# Altium PCB PCB_LVTN.PcbDoc
Units mil, origin at the board's own origin, x right, y up, seen from the top; angles counter-clockwise.
Board outline 2086.61 x 2086.61 mil, 2 copper layers (Top Layer, Bottom Layer); 16 components, 14 nets, 74 pads, 2 vias.
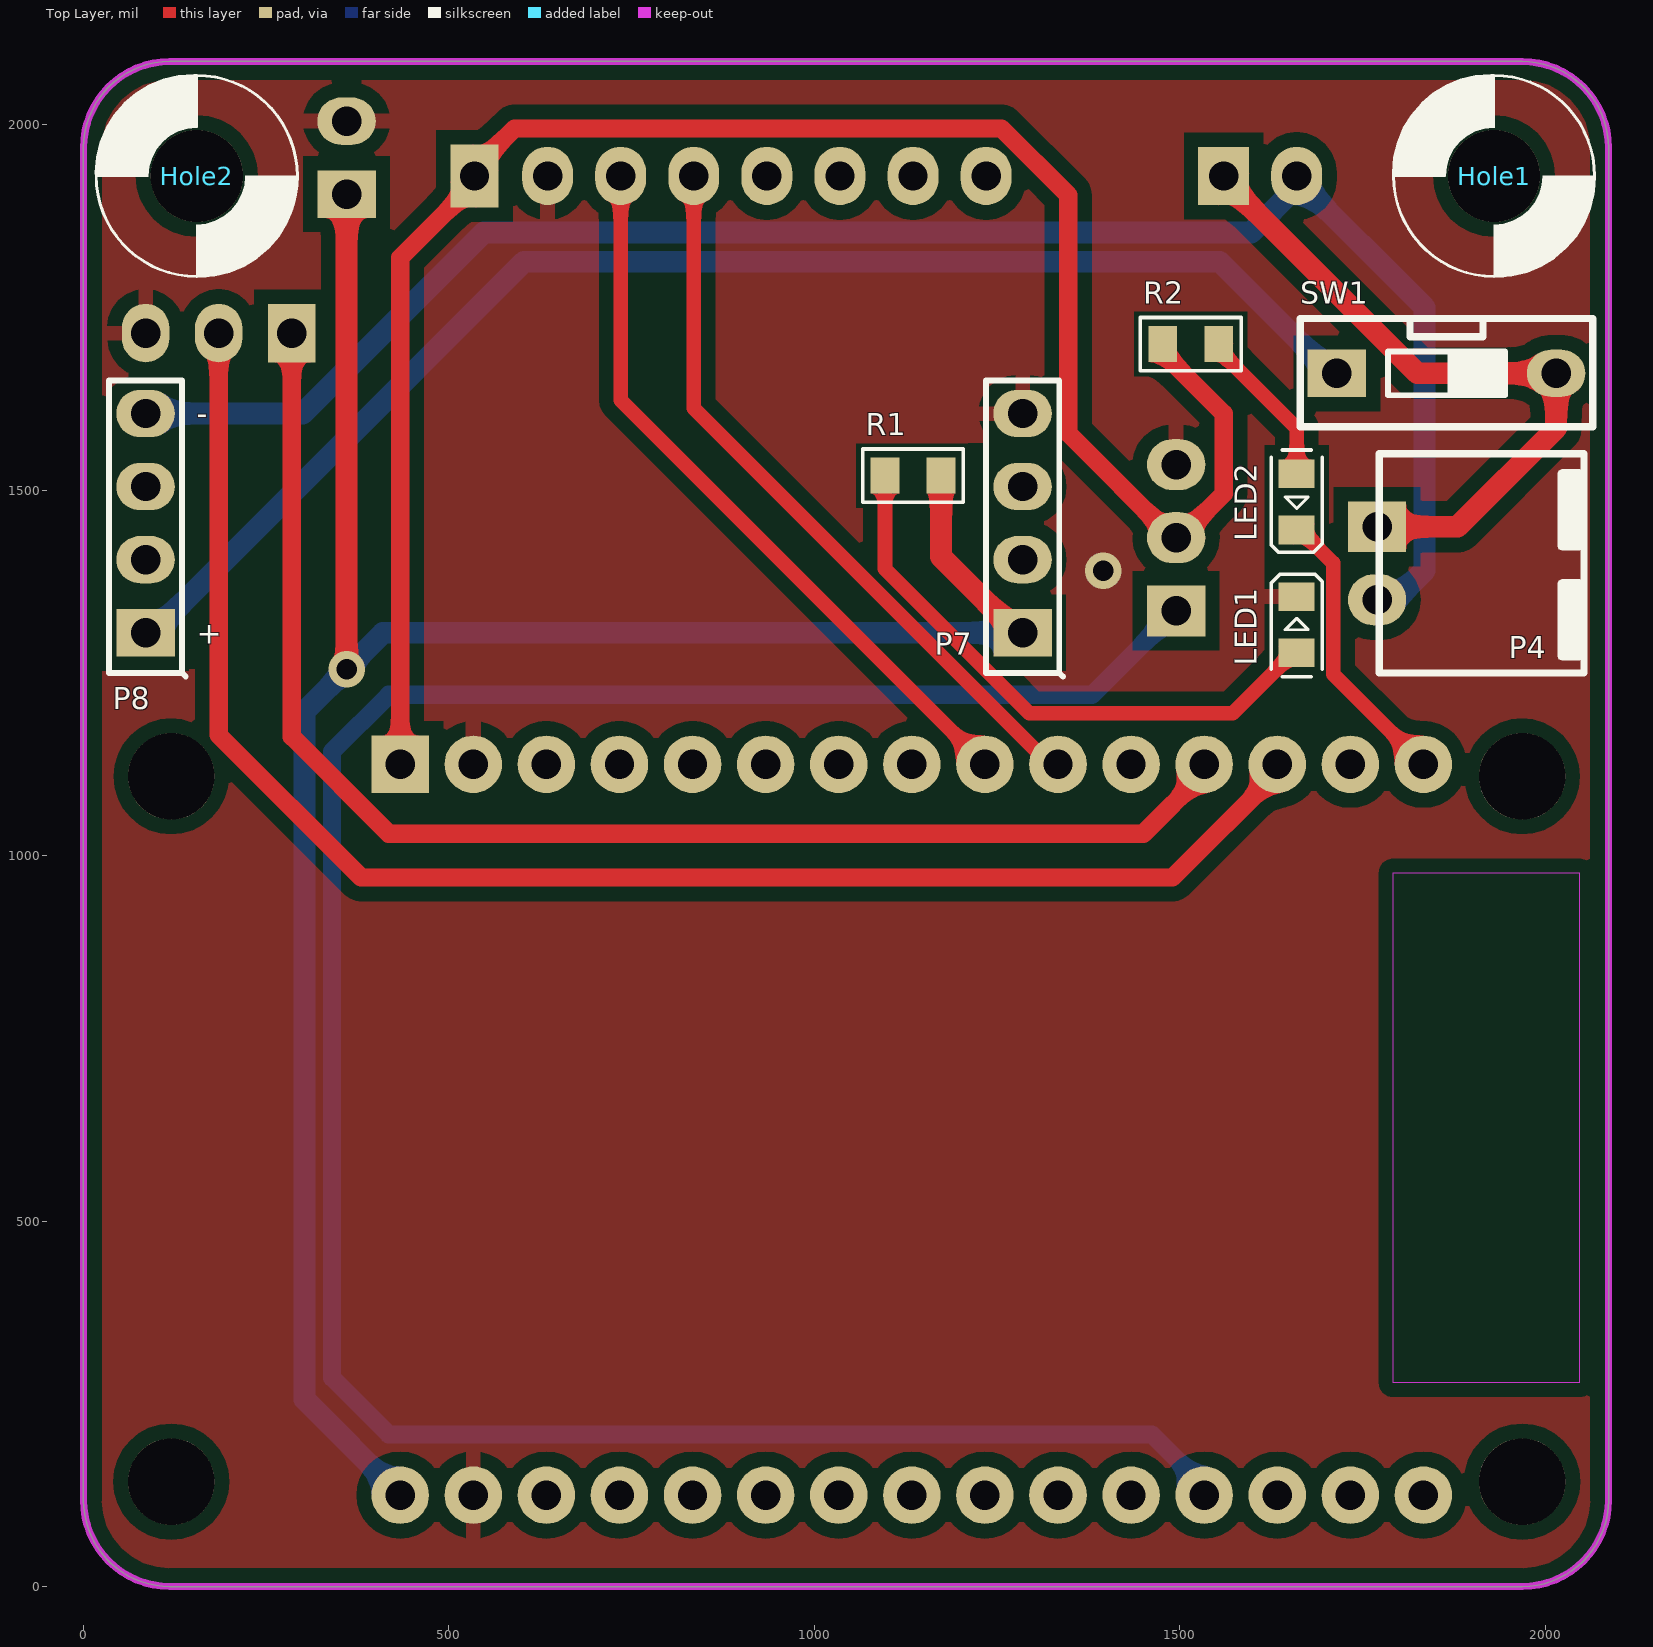
[diagram p0: Top Layer view]
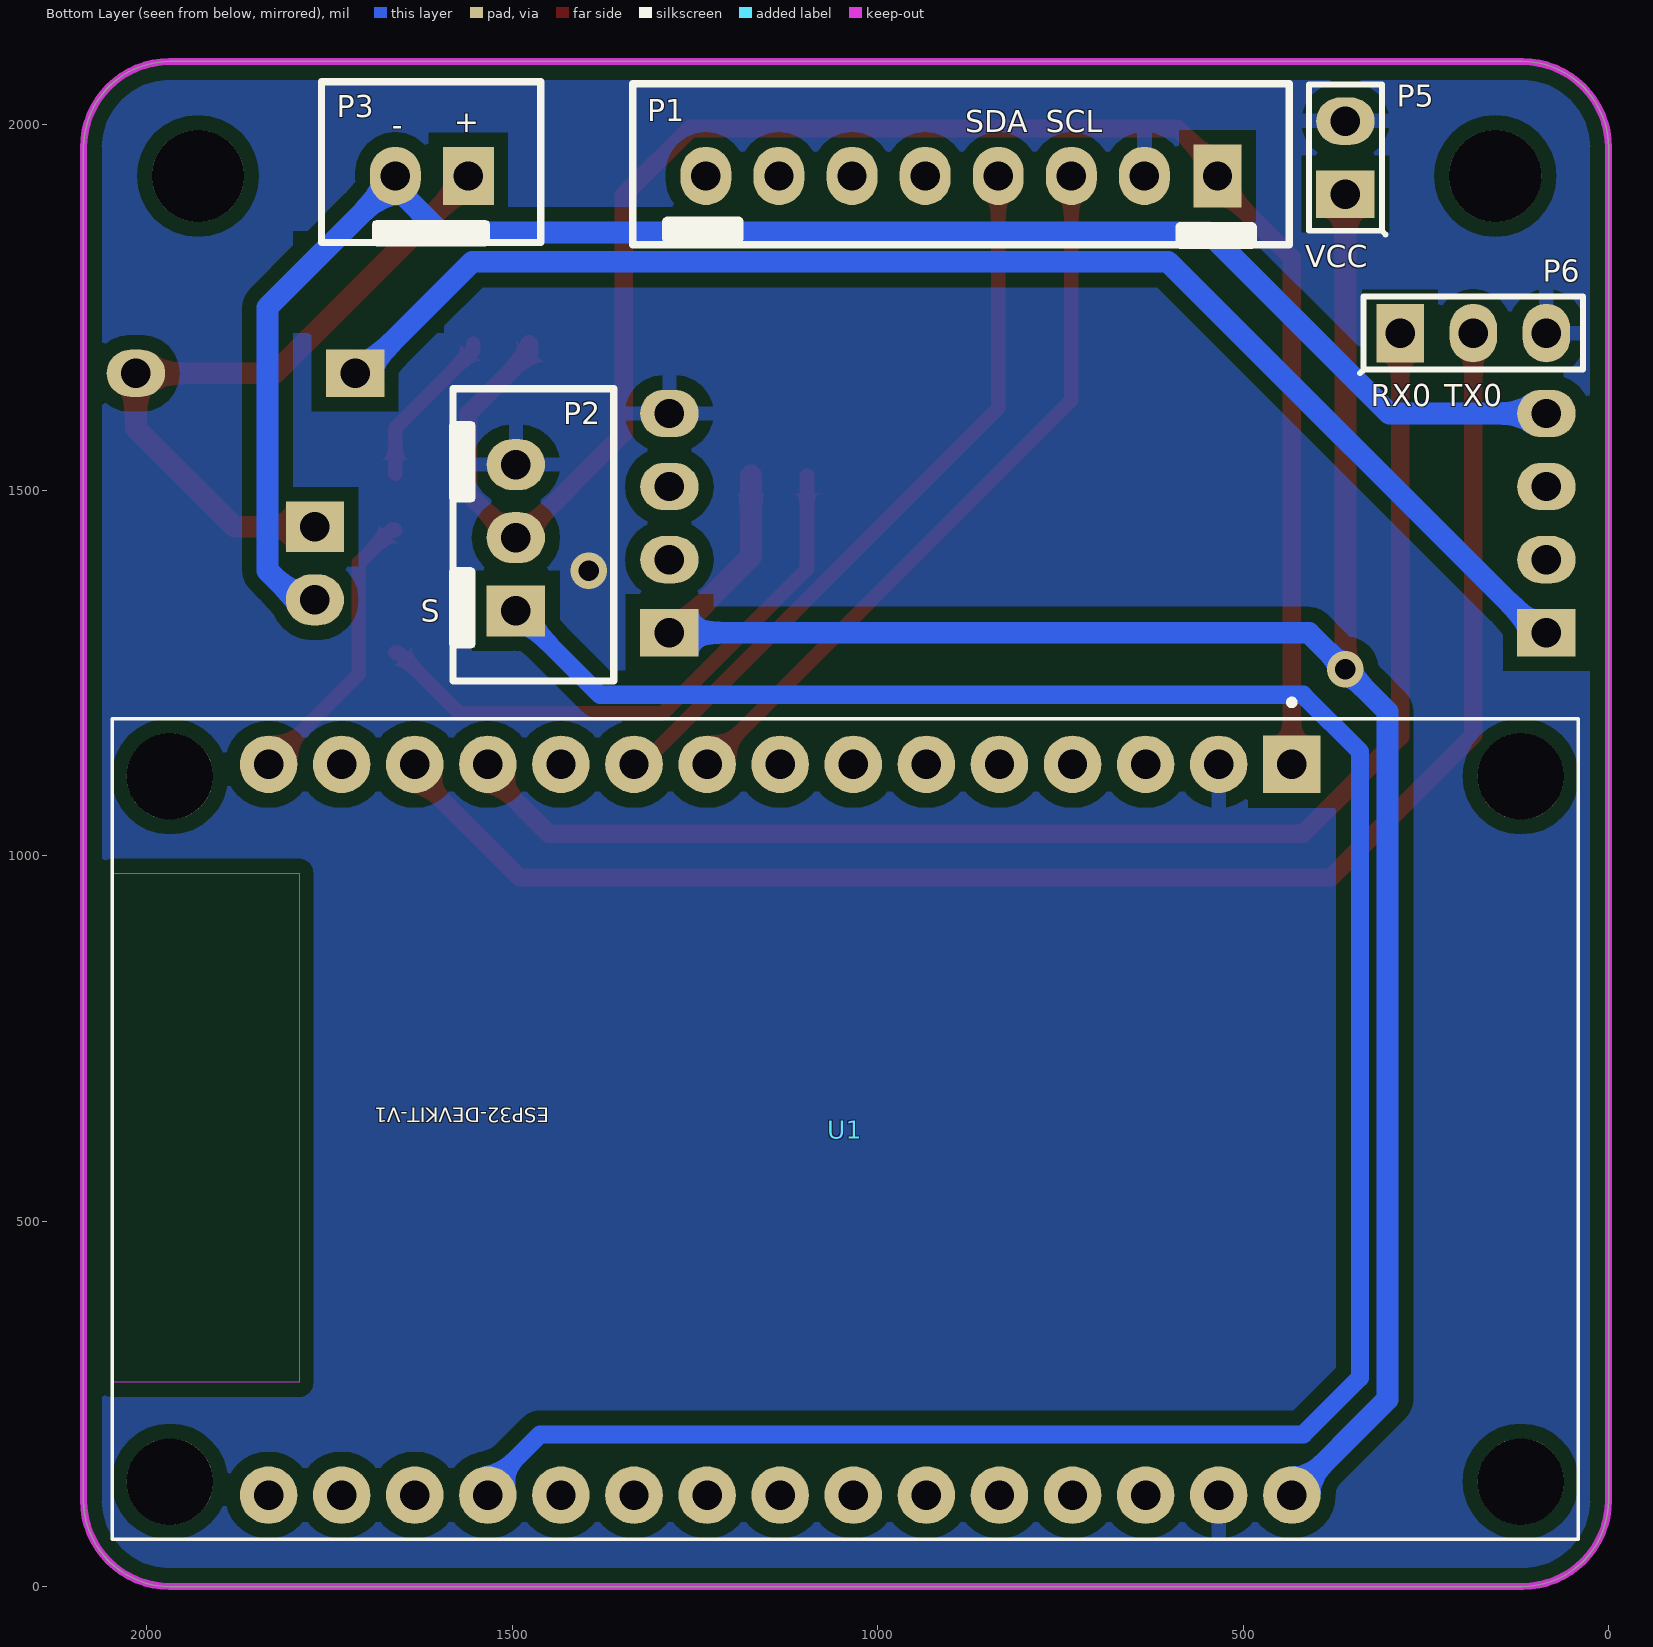
[diagram p1: Bottom Layer view, seen from below]
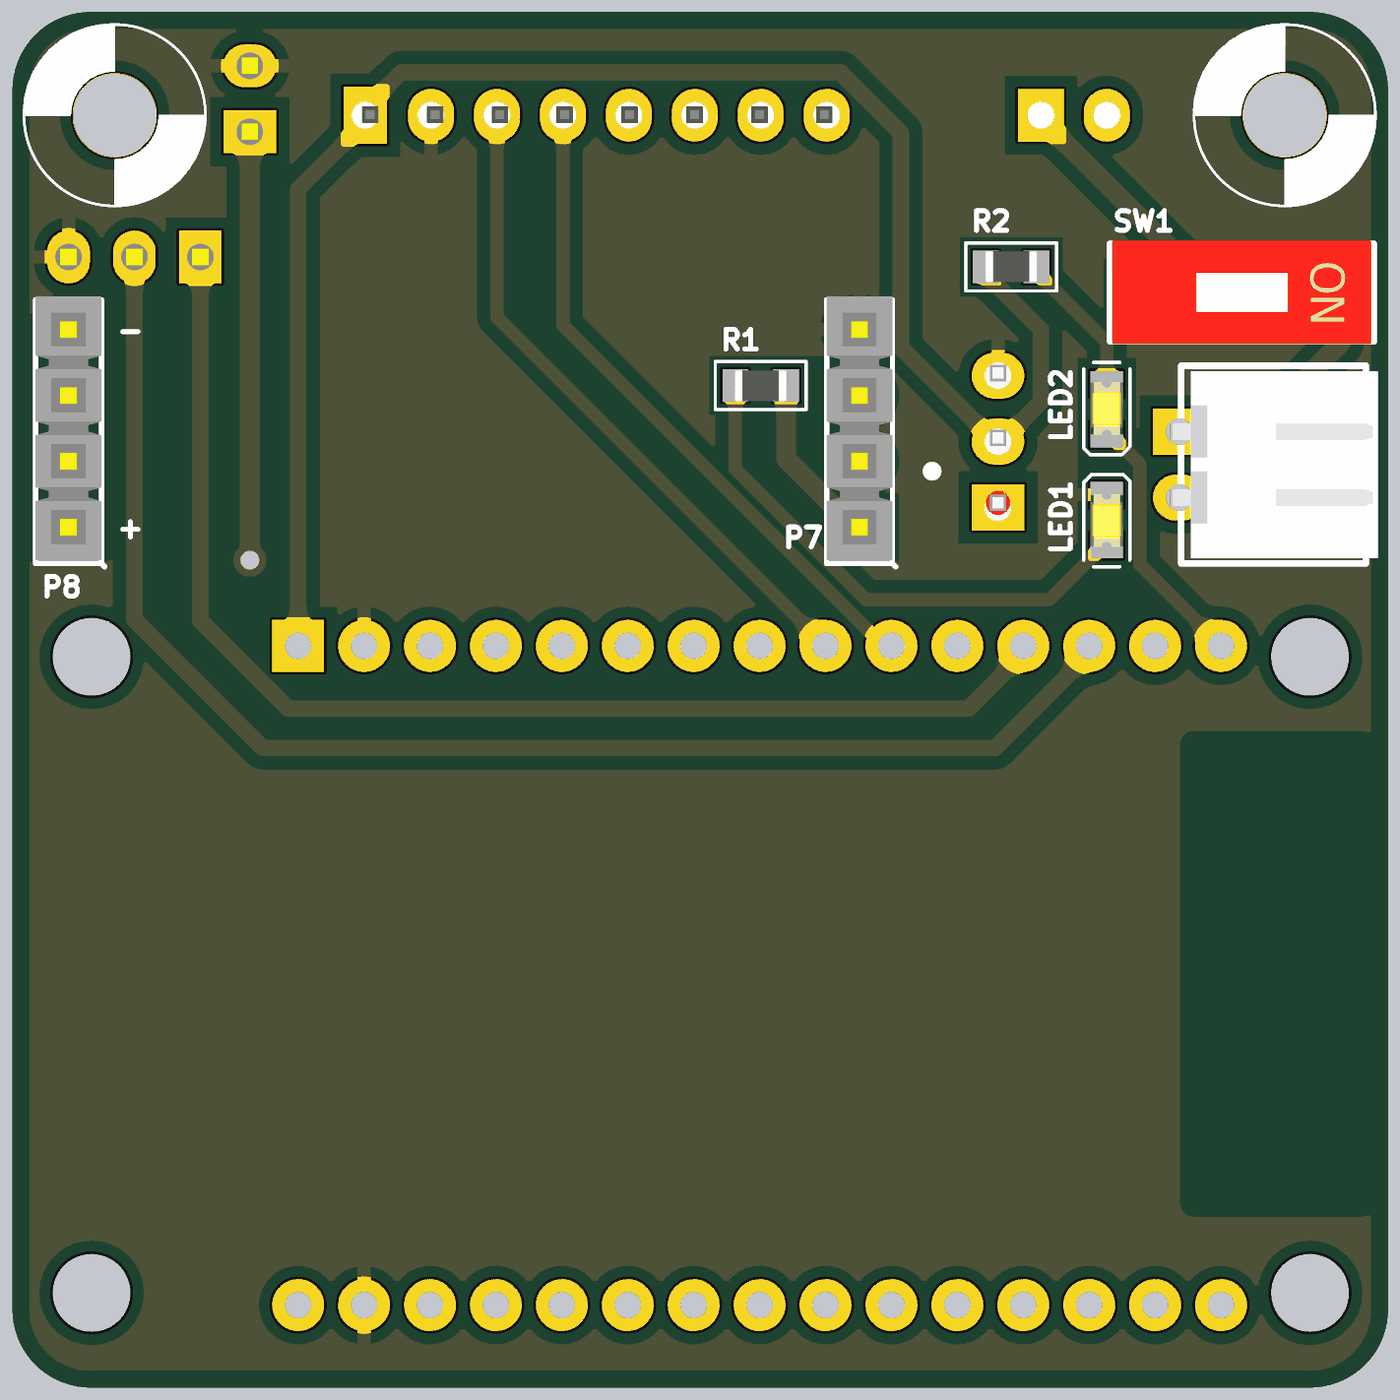
[diagram p2: 3D render of the assembled board from above, using the file's embedded part models]
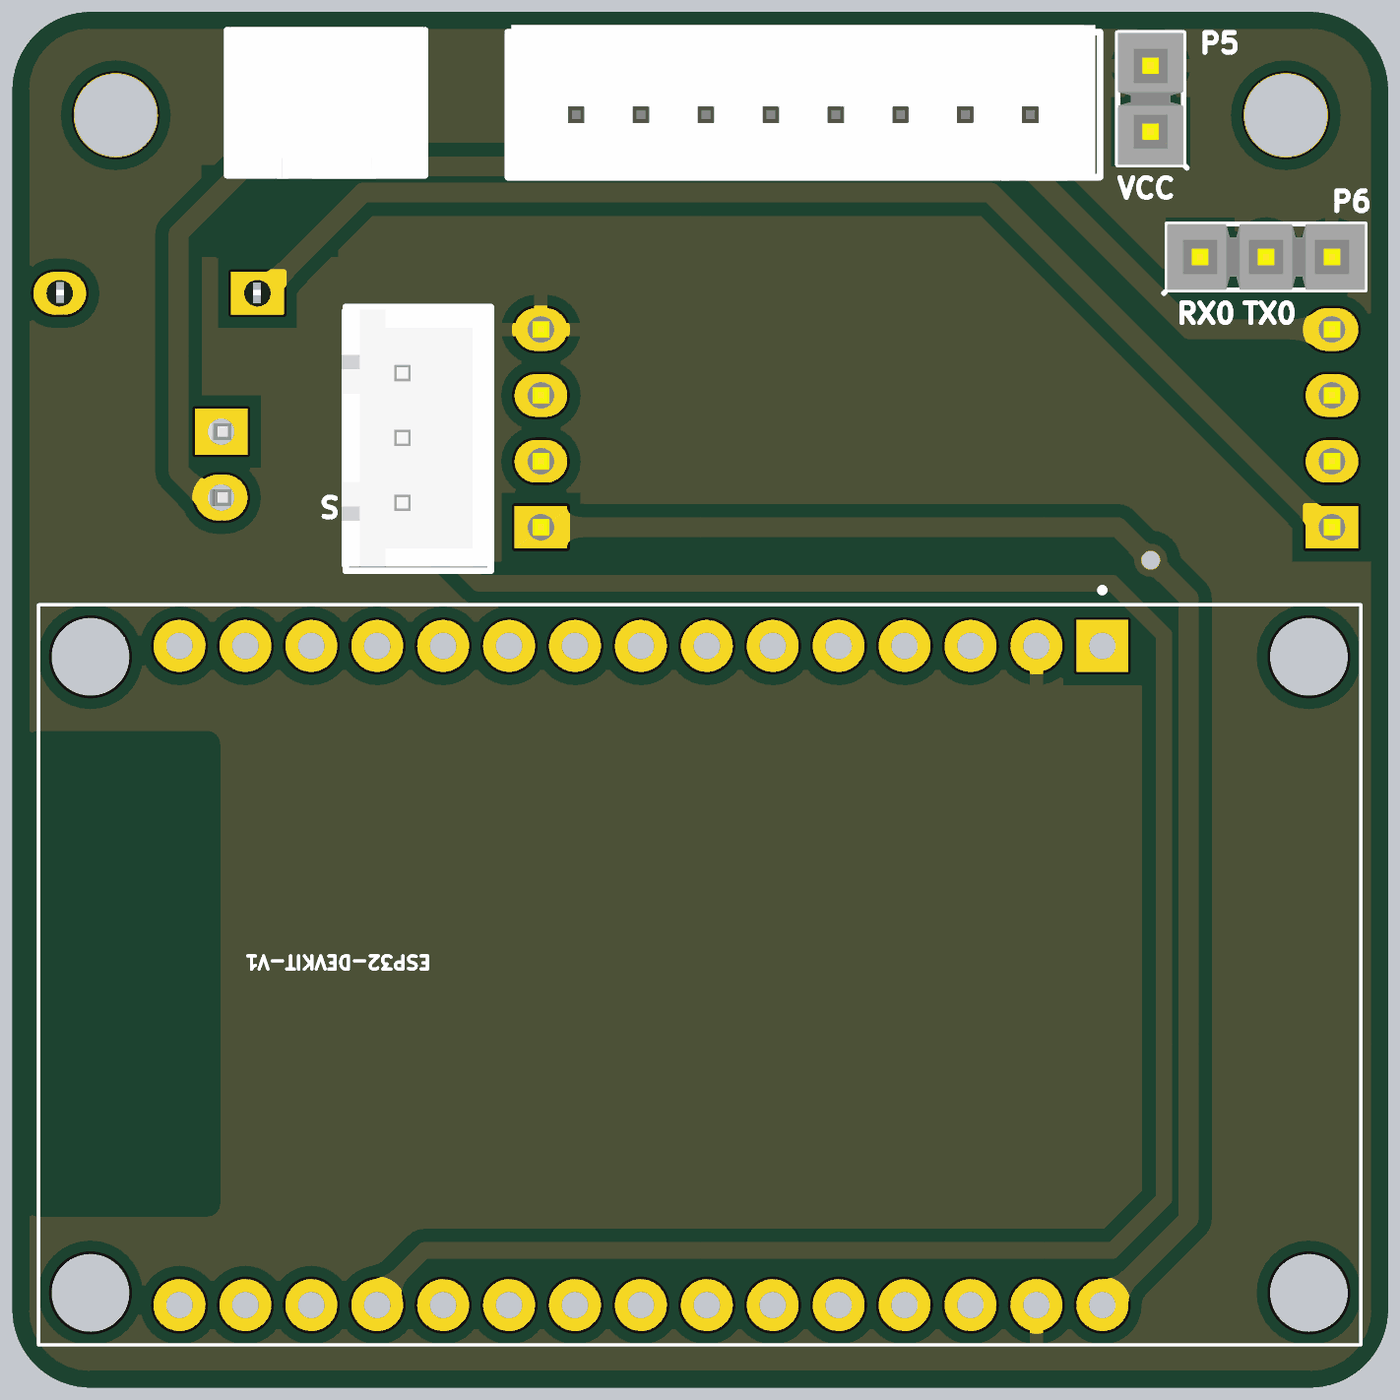
[diagram p3: 3D render of the assembled board from below, using the file's embedded part models]

## Layer stack, top to bottom
Top Solder: solder mask 0.4, Solder Resist, Dk 3.5
Top Layer: signal copper 1.4
Dielectric 1: dielectric 12.6, FR-4, Dk 4.8
Bottom Layer: signal copper 1.4
Bottom Solder: solder mask 0.4, Solder Resist, Dk 3.5

## Board outline
0,118.11 0,1968.5 cw(c118.11,1968.5) 118.11,2086.61 1968.5,2086.61 cw(c1968.5,1968.5) 2086.61,1968.5 2086.61,118.11 cw(c1968.5,118.11) 1968.5,0 118.11,0 cw(c118.11,118.11)

## Design rules (kind name [scope] priority, off if disabled: settings)
Clearance [All] p1: gap=20 ignorepadtopadclearanceinfootprint=FALSE except(10: Arc-Arc Arc-Track Arc-SMDPad Arc-THPad Arc-Via Arc-Text Arc-Hole Track-Track Track-SMDPad Track-THPad Track-Via Track-Text Track-Hole SMDPad-SMDPad SMDPad-THPad SMDPad-Via SMDPad-Text SMDPad-Hole THPad-THPad THPad-Via THPad-Text THPad-Hole Via-Via Via-Text Via-Hole Text-Text Text-Hole)
PolygonConnect [All] p1: thpad.connectstyle=Relief thpad.reliefconductorwidth=20 thpad.reliefentries=4 thpad.polygonreliefangle="90 Angle" thpad.airgapwidth=20 smdpad.connectstyle=Relief smdpad.reliefconductorwidth=20 smdpad.reliefentries=4 smdpad.polygonreliefangle="90 Angle" smdpad.airgapwidth=20 via.connectstyle=Direct via.reliefconductorwidth=20 via.reliefentries=4 via.polygonreliefangle="90 Angle" via.airgapwidth=20
RoutingVias [All] p1: holewidth=28 width=50 viastyle="Through Hole" minholewidth=28 minwidth=50 maxholewidth=28 maxwidth=50
SolderMaskExpansion [All] p1: expansion=4
Width [All] p1: maxlimit=30 minlimit=10 preferedwidth=20
30 further rules are at their usual default settings.

## Components (designator, comment, footprint, x,y, rotation, side; value= is the part's Value field where it differs from the comment)
Hole1 "3mm" SCREW/3M/7M 1930,1930 r0 top
Hole2 "3mm" SCREW/3M/7M 155,1930 r0 top
LED1 "Led" "Led SMD 0805" 1660,1315 r90 top
LED2 "Led" "Led SMD 0805" 1660,1485 r270 top
P1 "MPU6050" "CON Header 8" 535,1930 r0 bottom value="Connector 8"
P2 "PULSE-SENSOR" "CON Header 3" 1495,1335 r90 bottom value="Connector 3"
P3 "Power" "CON Header 2" 1760,1930 r0 bottom value="Connector 2"
P4 "Charge" "CON Header 2 - RA" 1770,1250 r270 top value="Connector 2"
P5 "Header 2" "Header 2" 360,1905 r90 bottom
P6 "Header 3" "Header 3" 285,1715 r180 bottom
P7 "MT3608_OUT" "Header 4" 1285,1305 r90 top
P8 "MT3608_IN" "Header 4" 85,1305 r90 top
R1 "10k" "R 0805 (2012)" 1135,1520 r0 top
R2 "4K7" "R 0805 (2012)" 1515,1700 r180 top
SW1 "SW Power" SW/DIP1 1715,1660 r270 top
U1 "ESP32-DEVKIT-V1" MODULE_ESP32_DEVKIT_V1 1044.17,625 r270 bottom

## Footprints (in the part's own frame and the unit in brackets; to place one, negate y for a bottom-side part, rotate by r counter-clockwise, add the part's x,y. Pads: shape width x height; smd on the part's side, far side on the other; paste and mask are expansions set on the pad)
"CON Header 2" [mm]
  rect 1.771x2.025 hole 1.02: 1(-5.08,0)
  oval 1.771x2.025 hole 1.02: 2(-2.54,0)
  silkscreen extent -7.59,-3.28 0.03,2.45, body extent -7.55,-3.4 -0.05,2.4, height 7.25
"CON Header 2 - RA" [mm]
  rect 1.771x2.025 hole 1.02: 1(-5.08,0)
  oval 1.771x2.025 hole 1.02: 2(-2.54,0)
  silkscreen extent -7.62,0.08 0,7.19, body extent -7.42,-0.38 -0.2,7.66, height 5.84
"CON Header 3" [mm]
  rect 1.771x2.025 hole 1.02: 1(0,0)
  oval 1.771x2.025 hole 1.02: 2(2.54,0) 3(5.08,0)
  silkscreen extent -2.44,-3.4 7.72,2.32, body extent -2.27,-3.4 7.63,2.35, height 7.25
"CON Header 8" [mm]
  rect 1.677x2.203 hole 1.02: 1(0,0)
  oval 1.771x2.025 hole 1.02: 2(2.54,0) 3(5.08,0) 4(7.62,0) 5(10.16,0) 6(12.7,0) 7(15.24,0) 8(17.78,0)
  silkscreen extent -2.49,-3.2 20.32,2.53, body extent -2.31,-3.48 20.19,2.32, height 7
"Header 2" [mil]
  rect 64.72x80 hole 40.16: 1(0,0)
  oval 64.72x80 hole 40.16: 2(100,0)
  silkscreen extent -55,-55 150,50, body extent -50,-50 150,50, height 350
"Header 3" [mil]
  rect 64.72x80 hole 40.16: 1(0,0)
  oval 64.72x80 hole 40.16: 2(100,0) 3(200,0)
  silkscreen extent -55,-55 250,50, body extent -50,-50 250,50, height 350
"Header 4" [mil]
  rect 64.72x80 hole 40.16: 1(0,0)
  oval 64.72x80 hole 40.16: 2(100,0) 3(200,0) 4(300,0)
  silkscreen extent -60,-55 345,50, body extent -50,-50 350,50, height 350
"Led SMD 0805" [mm] "Led SMD 0805"
  rect 1x1.25 smd: 1(-0.95,0) 2(1,0)
  silkscreen extent -1.78,-0.89 1.78,0.89, body extent -1.01,-0.62 1.01,0.63, height 1.1
MODULE_ESP32_DEVKIT_V1 [mm]
  rect 2x2 hole 1.02: 1(-12.7,15.515)
  round 2 hole 1.02: 2(-12.7,12.975) 3(-12.7,10.435) 4(-12.7,7.895) 5(-12.7,5.355) 6(-12.7,2.815) 7(-12.7,0.275) 8(-12.7,-2.265) 9(-12.7,-4.805) 10(-12.7,-7.345) 11(-12.7,-9.885) 12(-12.7,-12.425) 13(-12.7,-14.965) 14(-12.7,-17.505) 15(-12.7,-20.045) 16(12.7,-20.045) 17(12.7,-17.505) 18(12.7,-14.965) 19(12.7,-12.425) 20(12.7,-9.885) 21(12.7,-7.345) 22(12.7,-4.805) 23(12.7,-2.265) 24(12.7,0.275) 25(12.7,2.815) 26(12.7,5.355) 27(12.7,7.895) 28(12.7,10.435) 29(12.7,12.975) 30(12.7,15.515)
  round 3 hole 3 unplated: ""(-12.28,-23.475) ""(-12.28,23.475) ""(12.23,-23.475) ""(12.23,23.475)
  Keep-Out Layer region: 8.78,-25.475 -8.91,-25.475 -8.91,-18.985 8.78,-18.985
  Keep-Out Layer region: 8.78,-25.475 -8.91,-25.475 -8.91,-18.985 8.78,-18.985
  Keep-Out Layer region: 8.78,-25.475 -8.91,-25.475 -8.91,-18.985 8.78,-18.985
  silkscreen extent -14.95,-25.48 14.23,25.48
"R 0805 (2012)" [mm] "Chip Resistor, 2-Leads, Body 2.0x1.3mm, IPC Medium Density"
  rect 1x1.25 smd: 1(-0.975,0) 2(0.975,0)
  silkscreen extent -1.75,-0.92 1.75,0.92, body extent -1,-0.61 1,0.59, height 0.5
SCREW/3M/7M [mm]
  round 3.2 hole 3.2: 1(0,0)
  silkscreen extent -3.54,-3.53 3.53,3.54
SW/DIP1 [mil]
  rect 64.72x80 hole 40.16: 1(0,0)
  oval 64.72x80 hole 40.16: 2(0,300)
  silkscreen extent -75,-50 73,350, body extent -80,-47 77,347, height 269

## Part data
Hole1 Hole2: library part Screw
LED1 LED2: "Typical LED"
P1: library part Con8, "Connector 8"
P2: library part Con3, "Connector 3"
P3 P4: library part Con2, "Connector 2"
P5: "Header, 2-Pin", LatestRevisionDate=17-Jul-2002, LatestRevisionNote="Re-released for DXP Platform.", Publisher="Altium Limited"
P6: "Header, 3-Pin"
P7 P8: library part "Header 4", "Header, 4-Pin"
R1 R2: library part Resistor, "Resistor", LatestRevisionDate=17-Jul-2002, LatestRevisionNote="Re-released for DXP Platform.", PackageReference=AXIAL-0.3, Published=8-Jun-2000, Publisher="Altium Limited"
SW1: library part "SW DIP-1"
U1: "Dual core, Wi-Fi: 2.4 GHz up to 150 Mbits/s,BLE (Bluetooth Low Energy) and legacy Bluetooth, 32 bits, Up to 240 MHz", Package=None, Availability="Not in stock", Check_prices=https://www.snapeda.com/parts/ESP32-DEVKIT-V1/Do+it/view-part/?ref=eda, MF="Do it", MP=ESP32-DEVKIT-V1, Price=None, SnapEDA_Link=https://www.snapeda.com/parts/ESP32-DEVKIT-V1/Do+it/view-part/?ref=snap

## Via types
v1: diameter 50, hole 28, Top Layer to Bottom Layer, tented both sides, 2 vias

## Nets (pads, with @x,y where several pads share a name; then routed paths per layer and width w, separated by ;. In a path a pad name is that pad's centre, name@x,y a point inside that pad or via, vN(x,y) a via of type N, cw(c..) or ccw(c..) an arc to the next point about the centre after c; other vN are vias at no path point)
3V3: P1.1 P2.2 R2.2 U1.1 | length 2592.5
  Top Layer w25: U1.1 433.35,1818 535,1919.66 P1.1 535,1940.34 589.66,1995 1256.12,1995 1347.5,1903.62 1347.5,1577.5 1490,1435 P2.2 1500,1435 1560,1495 1560,1605 1476.61,1688.39 R2.2
BAT+: P8.1 SW1.1 | length 1903.5
  Bottom Layer w30: P8.1 95,1305 602.64,1812.64 1554.72,1812.64 1707.36,1660 SW1.1
BAT-: P3.2 P4.2 P8.4 | length 2407.3
  Bottom Layer w30: P8.4 300,1605 547.64,1852.64 1597.64,1852.64 1660,1915 P3.2@1660,1925 ; P3.2 P3.2@1660,1925 ; P4.2 1795,1350 1834.86,1389.86 1834.86,1750.14 P3.2@1660,1925
DEBUG_LED: LED2.2 U1.15 | length 395.3
  Top Layer w20: LED2.2 1664.92,1445.61 1710.14,1400.4 1710.14,1248.21 U1.15
GND: LED1.2 P1.2 P2.3 P5.2 P6.3 P7.4 U1.2 U1.29
  other v1: 1395,1390
MPU_SCL: P1.3 U1.9 | length 1011.4
  Top Layer w20: P1.3 735,1623.35 U1.9
MPU_SDA: P1.4 U1.10 | length 1018.1
  Top Layer w20: P1.4 835,1611.93 1321.93,1125 U1.10
NetLED1_1: LED1.1 R1.1 | length 806.8
  Top Layer w20: R1.1 1096.61,1392.74 1294.35,1195 1572.46,1195 1655.08,1277.61 LED1.1
NetLED2_1: LED2.1 R2.1 | length 221.8
  Top Layer w20: R2.1 1553.39,1691.61 1660,1585 LED2.1
NetP3_1: P3.1 P4.1 SW1.2 | length 945.7
  Top Layer w30: P3.1 1560,1925 1825,1660 SW1.2 2015,1585 1880,1450 P4.1
PULSE_ADC: P2.1 U1.19 | length 3358.1
  Bottom Layer w25: P2.1 1380,1220 417.79,1220 340,1142.21 340,285.7 417.78,207.92 1462.08,207.92 1533.35,136.65 U1.19
RX0: P6.1 U1.12 | length 1901.7
  Top Layer w25: P6.1 285,1162.79 417.79,1030 1450,1030 1533.35,1113.35 U1.12
TX0: P6.2 U1.13 | length 2150.1
  Top Layer w25: P6.2 185,1165 380,970 1490,970 1633.35,1113.35 U1.13
VCC: P5.1 P7.1 R1.2 U1.30 | length 3069.4
  Top Layer w30: v1(360,1255) P5.1 ; R1.2 1173.39,1408.98 1277.36,1305 P7.1
  Bottom Layer w30: U1.30 302.5,255.85 302.5,1197.5 v1(360,1255) 410,1305 P7.1
pads on no net: Hole1.1 Hole2.1 P1.5 P1.6 P1.7 P1.8 P7.2 P7.3 P8.2 P8.3 U1. U1.3 U1.4 U1.5 U1.6 U1.7 U1.8 U1.11 U1.14 U1.16 U1.17 U1.18 U1.20 U1.21 U1.22 U1.23 U1.24 U1.25 U1.26 U1.27 U1.28

## Polygon pours and split planes (outlines as drawn)
GND on Top Layer "Top Layer-GND" (solid, pour order 4): 0.81,0 2085.81,0 2085.81,2085 0.81,2085
no net on Top Layer "Top Layer-No Net" (solid, pour order 0): 0,0
GND on Bottom Layer "Bottom Layer-GND" (solid, pour order 6): 7.5,0 2092.5,0 2092.5,2085 7.5,2085

## Keep-outs
Keep-Out Layer:
  the board outline again, w10

## Other copper
Top Layer:
  pour cut-out: 1725,1165 1725,1235 1600,1235 1600,1165
  pour cut-out: 317.78,1227.89 317.78,1125 400.57,1125 400.57,1225.73
  pour cut-out: 1215,1415 1255,1415 1255,1564.73 1215,1564.73
  pour cut-out: 110,1685 155,1685 155,1255 110,1255
  pour cut-out: 1615.39,1405.93 1667.14,1405.93 1667.14,1394.07 1615.39,1394.07
  pour cut-out: 765,1895 765,1601.27 805,1601.27 805,1895
  pour cut-out: 252.22,1198.96 222.35,1198.96 222.35,1670 250,1670
  pour cut-out: 227.64,1676.91
  pour cut-out: 317.78,1655 324.7,1655 324.7,1260.56 317.78,1260.56
  pour cut-out: 395.3,1852.64 415,1852.64 415,1262.76 395.3,1262.76
  pour cut-out: 765,1895
Bottom Layer:
  pour cut-out: 407.82,1219.65 407.82,1265 1345,1265 1345,1219.65
  pour cut-out: 1800,1715 1592.72,1715 1592.72,1855 1800,1855
  pour cut-out: 110,1685 340,1685 340,1640 110,1640
  pour cut-out: 351.72,1565.08 124.78,1565.08 124.78,1357.36 144.01,1357.36
  region: 1385,1305
  region net VCC: 1815,1285

## Silkscreen, mask and mechanical layers (free items; w line width, h text height)
Top Overlay:
  text "-" at 155,1590 h30
  text "+" at 155,1290 h30
Bottom Overlay:
  text "SCL" at 770,1990 h30
  text "SDA" at 880,1990 h30
  text "+" at 1545,1990 h30
  text "-" at 1650,1985 h30
  text "VCC" at 415,1805 h30
  text "TX0" at 225,1615 h30
  text "RX0" at 325,1615 h30
  text "S" at 1625,1320 h30